# Altium PCB ESP32-C6-DisplayBoard.PcbDoc
Units mm, origin at the board's own origin, x right, y up, seen from the top; angles counter-clockwise.
Board outline 43 x 73 mm, 2 copper layers (Top Layer, Bottom Layer), stack 1.569 mm thick; 26 components, 31 nets, 175 pads, 72 vias.
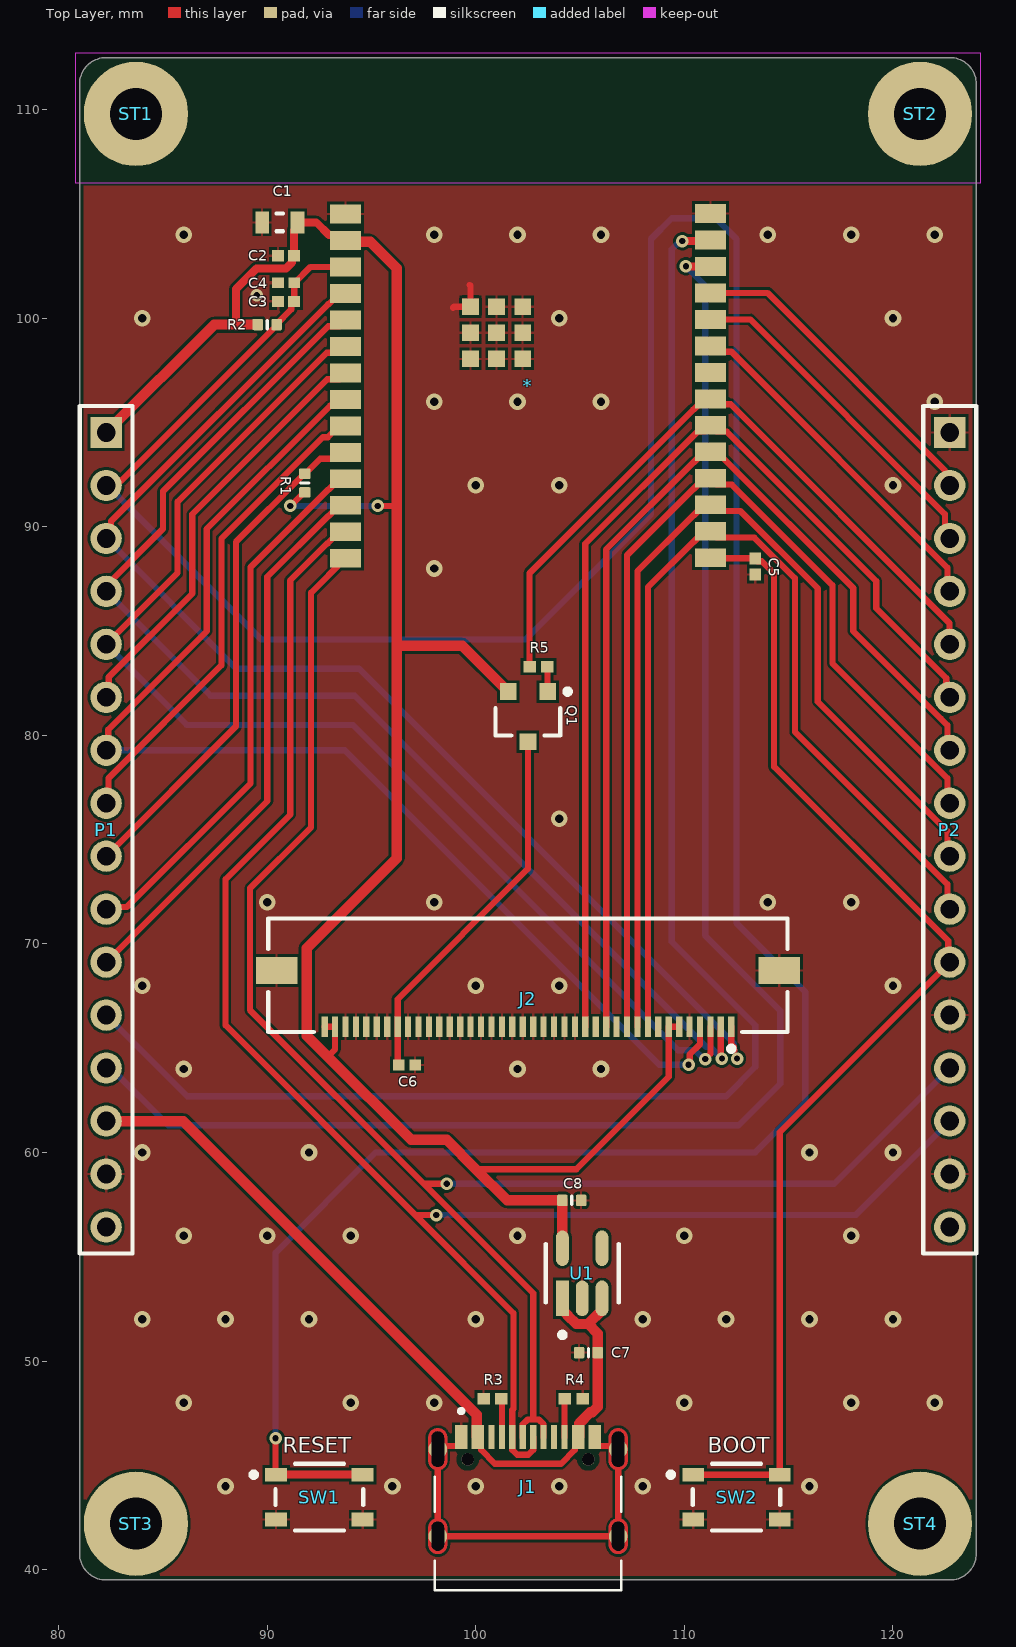
[diagram p0: Top Layer view]
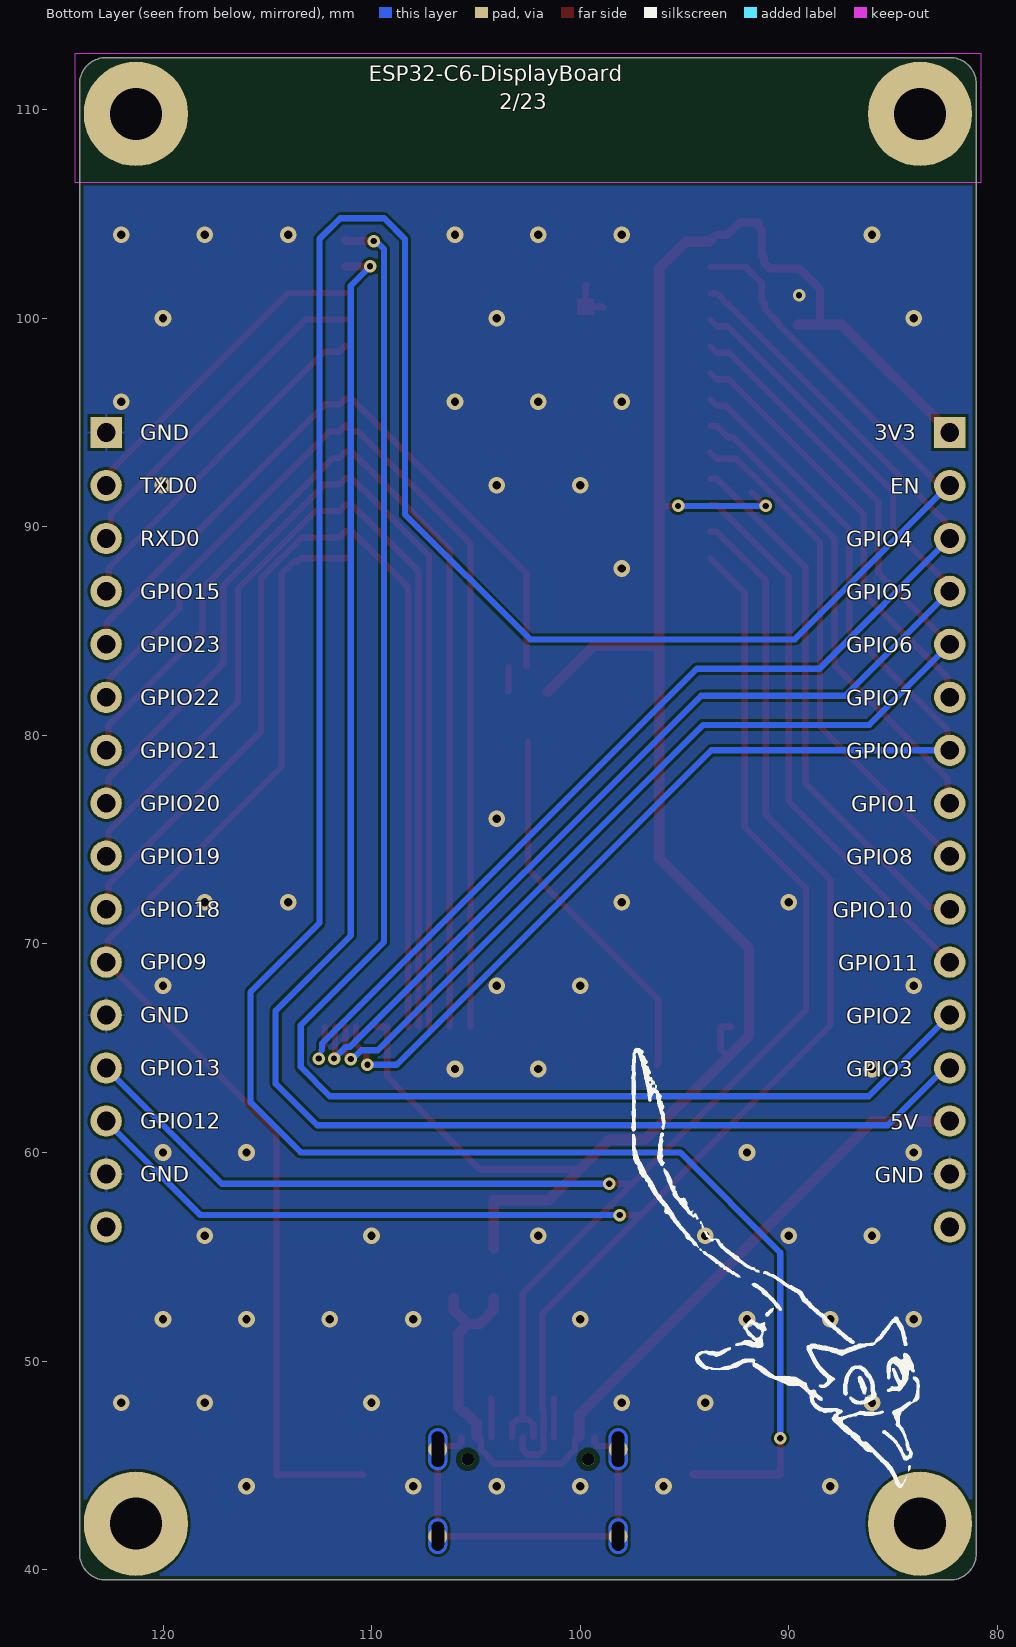
[diagram p1: Bottom Layer view, seen from below]
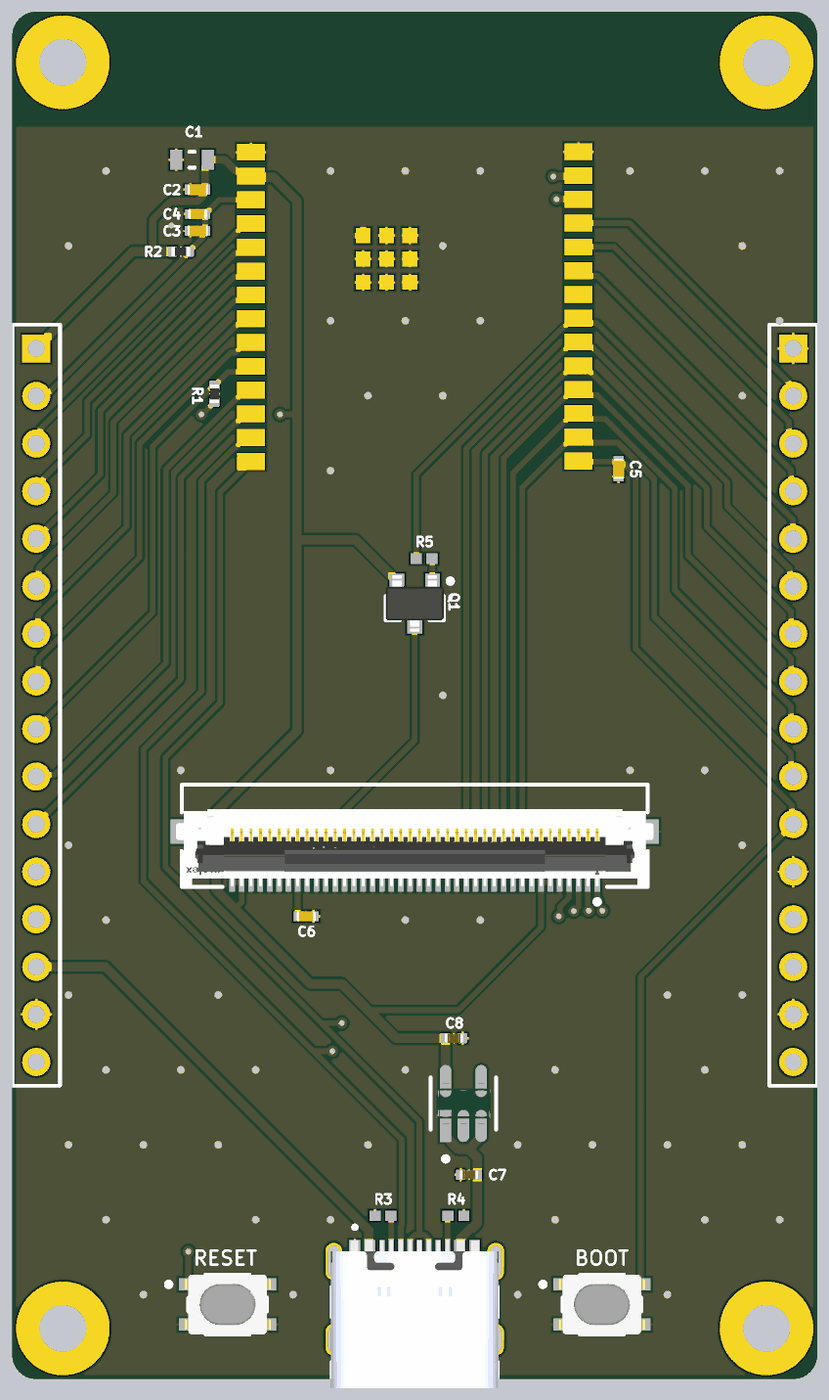
[diagram p2: 3D render of the assembled board from above, using the file's embedded part models]

## Layer stack, top to bottom
Top Solder: solder mask 0.0254, SM-001, Dk 4
Top Layer: signal copper 0.035
Dielectric 1: core 1.4986, Core-043, Dk 4.3
Bottom Layer: signal copper 0.035
Bottom Solder: solder mask 0.0254, SM-001, Dk 4

## Board outline
81,40.77 81,111.23 cw(c82.27,111.23) 82.27,112.5 122.73,112.5 cw(c122.73,111.23) 124,111.23 124,40.77 cw(c122.73,40.77) 122.73,39.5 82.27,39.5 cw(c82.27,40.77)

## Design rules (kind name [scope] priority, off if disabled: settings)
BoardOutlineClearance [All] p1: gap=0.2 ignorepadtopadclearanceinfootprint=FALSE
Clearance [All] p1: gap=0.127 ignorepadtopadclearanceinfootprint=FALSE except(0.25: Arc-Hole Track-Hole SMDPad-Hole THPad-Hole Via-Hole Fill-Hole Poly-Hole Region-Hole Text-Hole)
ComponentClearance [All] p1: gap=0.127 collisioncheckmode=3 verticalgap=0.127 showdistances=TRUE
DiffPairsRouting [All] p1: maxlimit=0.254 minlimit=0.127 mostfreqgap=0.127 toplayer_minwidth=0.127 toplayer_maxwidth=25.4 toplayer_prefwidth=0.127 bottomlayer_minwidth=0.127 bottomlayer_maxwidth=25.4 bottomlayer_prefwidth=0.127 maxuncoupledlength=12.7
Height [All] p1: minheight=0 maxheight=1816.048 prefheight=12.7
HoleSize [All] p1: absolutevalues=TRUE maxlimit=6.3 minlimit=0.3 maxpercent=80.000 minpercent=20.000
HoleToHoleClearance [All] p1: gap=0.25 allowstackedmicrovias=FALSE
MinimumAnnularRing [All] p1: minimumring=0.076
MinimumSolderMaskSliver [All] p1: minsoldermaskwidth=0
PlaneClearance [All] p1: clearance=0.127
PlaneConnect PlaneConnectPowerPads [InPadClass('PowerPads')] p1: planeconnectstyle=Direct reliefexpansion=0.508 reliefentries=4 reliefconductorwidth=0.254 reliefairgap=0.254
PlaneConnect [All] p2: pad.planeconnectstyle=Relief pad.reliefexpansion=0.3 pad.reliefentries=4 pad.reliefconductorwidth=0.127 pad.reliefairgap=0.127 via.planeconnectstyle=Direct via.reliefexpansion=0.3 via.reliefentries=4 via.reliefconductorwidth=0.127 via.reliefairgap=0.127
PolygonConnect PolygonConnectPowerPads [All vs (InPadClass('PowerPads'))] p1: connectstyle=Direct reliefconductorwidth=0.254 reliefentries=4 polygonreliefangle="90 Angle" airgapwidth=0.254
PolygonConnect [All] p2: thpad.connectstyle=Relief thpad.reliefconductorwidth=0.127 thpad.reliefentries=4 thpad.polygonreliefangle="90 Angle" thpad.airgapwidth=0.127 smdpad.connectstyle=Relief smdpad.reliefconductorwidth=0.127 smdpad.reliefentries=4 smdpad.polygonreliefangle="90 Angle" smdpad.airgapwidth=0.127 via.connectstyle=Direct via.reliefconductorwidth=0.127 via.reliefentries=4 via.polygonreliefangle="90 Angle" via.airgapwidth=0.127
RoutingVias [All] p1: holewidth=0.3 width=0.6 viastyle="Through Hole" minholewidth=0.3 minwidth=0.6 maxholewidth=0.6 maxwidth=6.6
SilkToSilkClearance [All] p1: silktosilkclearance=0
SilkToSolderMaskClearance [IsPad] p1: minsilkscreentomaskgap=0.127 clearancetoexposedcopper=TRUE
SolderMaskExpansion [All] p1: expansion=0.075 istentingtop=FALSE
Width [All] p1: maxlimit=25.4 minlimit=0.127 preferedwidth=0.127 minimp=50.000000 maximp=50.000000 favimp=50.000000
20 further rules are at their usual default settings.

## Classes and differential pairs
component class ESP32-C6-DisplayBoard: * C1 C2 C3 C4 C5 C7 C8 J1 R1 R2 R3 R4 ST1 ST2 ST3 ST4 SW1 SW2 U1
component class Components: C6 J2 P1 P2 Q1 R5

## Components (designator, comment, footprint, x,y, rotation, side; value= is the part's Value field where it differs from the comment)
* "ESP32-C6-WROOM-1" PCBComponent_1 105.775,86.907 r0 top
C1 "C1608X5R1A226M080AC" CAPC1608X100X20ML10 90.6,104.6 r0 top
C2 "Capacitor 0.1 uF +/- 5% 16 V 0402" CAPC1005X56X25LL10T15 90.9,103 r0 top value=100nF
C3 "Capacitor 0.1 uF +/- 5% 16 V 0402" CAPC1005X56X25LL10T15 90.9,100.8 r180 top value=100nF
C4 "Capacitor 1 uF +/- 10% 6.3 V 0402" CAPC1005X55X25LL05T10 90.9,101.7 r180 top value=1µF
C5 "Capacitor 0.1 uF +/- 5% 16 V 0402" CAPC1005X56X25LL10T15 113.4,88.1 r270 top value=100nF
C6 "Capacitor 1 uF +/- 10% 6.3 V 0402" CAPC1005X55X25LL05T10 96.7,64.2 r0 top value=1µF
C7 "Capacitor 2,2µF +/-20% 10V 0402" CAPC0402(1005)60_L 105.4,50.4 r180 top value=2.2µF
C8 "Capacitor 2,2µF +/-20% 10V 0402" CAPC0402(1005)60_L 104.6,57.7 r0 top value=2.2µF
J1 "TYPE-C-31-M-12" HRO_TYPE-C-31-M-12 102.5,41.6 r0 top
J2 "505110-4091" FP-505110-4091-MFG 102.5,68.5 r180 top
P1 "Header 16" HDR1X16 82.275,94.525 r270 top
P2 "Header 16" HDR1X16 122.725,94.525 r270 top
Q1 "AO3401A" AO-SOT-23-3L_V 102.5,80.9 r270 top
R1 "10KR2F" RESC0402(1005)_L 91.8,92.1 r270 top value=10k
R2 "10KR2F" RESC0402(1005)_L 90,99.7 r180 top value=10k
R3 "RC0402FR-075K1L" RESC1005X40X25NL05T10 100.8,48.2 r0 top
R4 "RC0402FR-075K1L" RESC1005X40X25NL05T10 104.7,48.2 r180 top
R5 "RC0402FR-075K1L" RESC1005X40X25NL05T10 103,83.3 r180 top
ST1 "PTH-M2D5X5" PTH-M2D5X5 83.7,109.8 r0 top
ST2 "PTH-M2D5X5" PTH-M2D5X5 121.3,109.8 r0 top
ST3 "PTH-M2D5X5" PTH-M2D5X5 83.7,42.2 r0 top
ST4 "PTH-M2D5X5" PTH-M2D5X5 121.3,42.2 r0 top
SW1 "PTS810SJM250SMTRLFS" FP-PTS810SJM250SMTRLFS-MFG 92.5,43.475 r0 top
SW2 "PTS810SJM250SMTRLFS" FP-PTS810SJM250SMTRLFS-MFG 112.5,43.475 r0 top
U1 "AP2112K-3.3TRG1" FP-SOT25-IPC_A 105.1,54.206 r90 top

## Footprints (in the part's own frame and the unit in brackets; to place one, negate y for a bottom-side part, rotate by r counter-clockwise, add the part's x,y. Pads: shape width x height; smd on the part's side, far side on the other; paste and mask are expansions set on the pad)
AO-SOT-23-3L_V [mm] "SOT23, 3-Leads, Body 3.1x1.8mm, Pitch 0.95mm"
  rect 0.8x0.8 smd: 1(-1.2,0.95) 2(-1.2,-0.95) 3(1.2,0)
  silkscreen extent -1.32,-1.55 0.9,2.03, body extent -1.5,-1.55 1.5,1.55, height 1.25
CAPC0402(1005)60_L [mm] "Chip Capacitor, Body 1.0x0.5mm, Height 0.6mm, IPC High Density"
  rrect25% 0.5x0.55 smd: 1(-0.45,0) 2(0.45,0)
  silkscreen extent 0,-0.2 0,0.2, body extent -0.5,-0.25 0.5,0.25, height 0.6
CAPC1005X55X25LL05T10 [mm] "Chip Capacitor, 2-Leads, Body 1.05x0.55mm, IPC High Density"
  rect 0.56x0.52 smd: 1(-0.39,0) 2(0.39,0)
  body extent -0.53,-0.28 0.53,0.28, height 0.55
CAPC1005X56X25LL10T15 [mm] "Chip Capacitor, 2-Leads, Body 1.10x0.60mm, IPC High Density"
  rect 0.58x0.54 smd: 1(-0.39,0) 2(0.39,0)
  body extent -0.55,-0.3 0.55,0.3, height 0.56
CAPC1608X100X20ML10 [mm] "Chip Capacitor, 2-Leads, Body 1.70x0.90mm, IPC Low Density"
  rect 0.65x1.05 smd: 1(-0.85,0) 2(0.85,0)
  silkscreen extent -0.15,-0.43 0.15,0.43, body extent -0.85,-0.45 0.85,0.45, height 1
FP-505110-4091-MFG [mm]
  rect 0.3x1 smd paste+0 mask+0: 1(-9.75,2.475) 2(-9.25,2.475) 3(-8.75,2.475) 4(-8.25,2.475) 5(-7.75,2.475) 6(-7.25,2.475) 7(-6.75,2.475) 8(-6.25,2.475) 9(-5.75,2.475) 10(-5.25,2.475) 11(-4.75,2.475) 12(-4.25,2.475) 13(-3.75,2.475) 14(-3.25,2.475) 15(-2.75,2.475) 16(-2.25,2.475) 17(-1.75,2.475) 18(-1.25,2.475) 19(-0.75,2.475) 20(-0.25,2.475) 21(0.25,2.475) 22(0.75,2.475) 23(1.25,2.475) 24(1.75,2.475) 25(2.25,2.475) 26(2.75,2.475) 27(3.25,2.475) 28(3.75,2.475) 29(4.25,2.475) 30(4.75,2.475) 31(5.25,2.475) 32(5.75,2.475) 33(6.25,2.475) 34(6.75,2.475) 35(7.25,2.475) 36(7.75,2.475) 37(8.25,2.475) 38(8.75,2.475) 39(9.25,2.475) 40(9.75,2.475)
  rect 2x1.3 smd paste+0 mask+0: 41(-12.05,-0.225) 42(12.05,-0.225)
  silkscreen extent -12.45,-2.73 12.45,3.65, body extent -13.15,-2.83 13.15,3.08, height 0.25
FP-PTS810SJM250SMTRLFS-MFG [mm]
  rect 1.05x0.65 smd paste+0 mask+0: 1(-2.075,1.075) 2(2.075,1.075) 3(-2.075,-1.075) 4(2.075,-1.075)
  silkscreen extent -3.27,-1.6 2.1,1.6, body extent -2.7,-1.7 2.7,1.7, height 0.25
FP-SOT25-IPC_A [mm]
  rect 1.707x0.616 smd paste+0 mask+0: 1(-1.201,0.95)
  rrect100% 1.707x0.616 smd paste+0 mask+0: 2(-1.201,0) 3(-1.201,-0.95) 4(1.201,-0.95) 5(1.201,0.95)
  silkscreen extent -3.08,-1.75 1.4,1.75, body extent -2.55,-2 2.55,2, height 0.25
HDR1X16 [mm] "Connector; Header; 16 Position"
  rect 1.5x1.5 hole 0.9: 1(0,0)
  round 1.5 hole 0.9: 2(2.54,0) 3(5.08,0) 4(7.62,0) 5(10.16,0) 6(12.7,0) 7(15.24,0) 8(17.78,0) 9(20.32,0) 10(22.86,0) 11(25.4,0) 12(27.94,0) 13(30.48,0) 14(33.02,0) 15(35.56,0) 16(38.1,0)
  silkscreen extent -1.27,-1.27 39.37,1.27
HRO_TYPE-C-31-M-12 [mm]
  rect 0.6x1.14 smd mask+0.05: A1/B12(-3.2,4.75) A4/B9(-2.4,4.75) B1/A12(3.2,4.75) B4/A9(2.4,4.75)
  rect 0.3x1.14 smd mask+0.05: A5(-1.25,4.75) A6(-0.25,4.75) A7(0.25,4.75) A8(1.25,4.75) B5(1.75,4.75) B6(0.75,4.75) B7(-0.75,4.75) B8(-1.75,4.75)
  round 0.9 hole 0.6 slot 1.7 at 90 deg mask+0: S1(-4.325,4.17) S2(4.325,4.17)
  round 0.9 hole 0.6 slot 1.4 at 90 deg mask+0: S3(-4.325,0) S4(4.325,0)
  round 0.6 hole 0.6 unplated: ""(-2.89,3.68) ""(2.89,3.68)
  Top Layer region: 4.349,0.849 4.372,0.848 4.395,0.844 4.419,0.84 4.441,0.835 4.464,0.828 4.486,0.82 4.508,0.811 4.529,0.801 4.55,0.79 4.57,0.777 4.59,0.764 4.608,0.75 4.626,0.734 4.643,0.718 4.659,0.701 4.675,0.683 4.689,0.665 4.702,0.645 4.715,0.625 4.726,0.604 4.736,0.583 4.745,0.561 4.753,0.539 4.76,0.516 4.765,0.494 4.769,0.47 4.773,0.447 4.774,0.424 4.775,0.4 4.775,-0.4 4.774,-0.424 4.773,-0.447 4.769,-0.47 4.765,-0.494 4.76,-0.516 4.753,-0.539 4.745,-0.561 4.736,-0.583 4.726,-0.604 4.715,-0.625 4.702,-0.645 4.689,-0.665 4.675,-0.683 4.659,-0.701 4.643,-0.718 4.626,-0.734 4.608,-0.75 4.59,-0.764 4.57,-0.777 4.55,-0.79 4.529,-0.801 4.508,-0.811 4.486,-0.82 4.464,-0.828 4.441,-0.835 4.419,-0.84 4.395,-0.844 4.372,-0.848 4.349,-0.849 4.325,-0.85 4.301,-0.849 4.278,-0.848 4.255,-0.844 4.231,-0.84 4.209,-0.835 4.186,-0.828 4.164,-0.82 4.142,-0.811 4.121,-0.801 4.1,-0.79 4.08,-0.777 4.06,-0.764 4.042,-0.75 4.024,-0.734 4.007,-0.718 3.991,-0.701 3.975,-0.683 3.961,-0.665 3.948,-0.645 3.935,-0.625 3.924,-0.604 3.914,-0.583 3.905,-0.561 3.897,-0.539 3.89,-0.516 3.885,-0.494 3.881,-0.47 3.877,-0.447 3.876,-0.424 3.875,-0.4 3.875,0.4 3.876,0.424 3.877,0.447 3.881,0.47 3.885,0.494 3.89,0.516 3.897,0.539 3.905,0.561 3.914,0.583 3.924,0.604 3.935,0.625 3.948,0.645 3.961,0.665 3.975,0.683 3.991,0.701 4.007,0.718 4.024,0.734 4.042,0.75 4.06,0.764 4.08,0.777 4.1,0.79 4.121,0.801 4.142,0.811 4.164,0.82 4.186,0.828 4.209,0.835 4.231,0.84 4.255,0.844 4.278,0.848 4.301,0.849 4.325,0.85
  Top Layer region: -4.301,0.849 -4.278,0.848 -4.255,0.844 -4.231,0.84 -4.209,0.835 -4.186,0.828 -4.164,0.82 -4.142,0.811 -4.121,0.801 -4.1,0.79 -4.08,0.777 -4.06,0.764 -4.042,0.75 -4.024,0.734 -4.007,0.718 -3.991,0.701 -3.975,0.683 -3.961,0.665 -3.948,0.645 -3.935,0.625 -3.924,0.604 -3.914,0.583 -3.905,0.561 -3.897,0.539 -3.89,0.516 -3.885,0.494 -3.881,0.47 -3.877,0.447 -3.876,0.424 -3.875,0.4 -3.875,-0.4 -3.876,-0.424 -3.877,-0.447 -3.881,-0.47 -3.885,-0.494 -3.89,-0.516 -3.897,-0.539 -3.905,-0.561 -3.914,-0.583 -3.924,-0.604 -3.935,-0.625 -3.948,-0.645 -3.961,-0.665 -3.975,-0.683 -3.991,-0.701 -4.007,-0.718 -4.024,-0.734 -4.042,-0.75 -4.06,-0.764 -4.08,-0.777 -4.1,-0.79 -4.121,-0.801 -4.142,-0.811 -4.164,-0.82 -4.186,-0.828 -4.209,-0.835 -4.231,-0.84 -4.255,-0.844 -4.278,-0.848 -4.301,-0.849 -4.325,-0.85 -4.349,-0.849 -4.372,-0.848 -4.395,-0.844 -4.419,-0.84 -4.441,-0.835 -4.464,-0.828 -4.486,-0.82 -4.508,-0.811 -4.529,-0.801 -4.55,-0.79 -4.57,-0.777 -4.59,-0.764 -4.608,-0.75 -4.626,-0.734 -4.643,-0.718 -4.659,-0.701 -4.675,-0.683 -4.689,-0.665 -4.702,-0.645 -4.715,-0.625 -4.726,-0.604 -4.736,-0.583 -4.745,-0.561 -4.753,-0.539 -4.76,-0.516 -4.765,-0.494 -4.769,-0.47 -4.773,-0.447 -4.774,-0.424 -4.775,-0.4 -4.775,0.4 -4.774,0.424 -4.773,0.447 -4.769,0.47 -4.765,0.494 -4.76,0.516 -4.753,0.539 -4.745,0.561 -4.736,0.583 -4.726,0.604 -4.715,0.625 -4.702,0.645 -4.689,0.665 -4.675,0.683 -4.659,0.701 -4.643,0.718 -4.626,0.734 -4.608,0.75 -4.59,0.764 -4.57,0.777 -4.55,0.79 -4.529,0.801 -4.508,0.811 -4.486,0.82 -4.464,0.828 -4.441,0.835 -4.419,0.84 -4.395,0.844 -4.372,0.848 -4.349,0.849 -4.325,0.85
  Top Layer region: 4.349,5.169 4.372,5.168 4.395,5.164 4.419,5.16 4.441,5.155 4.464,5.148 4.486,5.14 4.508,5.131 4.529,5.121 4.55,5.11 4.57,5.097 4.59,5.084 4.608,5.07 4.626,5.054 4.643,5.038 4.659,5.021 4.675,5.003 4.689,4.985 4.702,4.965 4.715,4.945 4.726,4.924 4.736,4.903 4.745,4.881 4.753,4.859 4.76,4.836 4.765,4.814 4.769,4.79 4.773,4.767 4.774,4.744 4.775,4.72 4.775,3.62 4.774,3.596 4.773,3.573 4.769,3.55 4.765,3.526 4.76,3.504 4.753,3.481 4.745,3.459 4.736,3.437 4.726,3.416 4.715,3.395 4.702,3.375 4.689,3.355 4.675,3.337 4.659,3.319 4.643,3.302 4.626,3.286 4.608,3.27 4.59,3.256 4.57,3.243 4.55,3.23 4.529,3.219 4.508,3.209 4.486,3.2 4.464,3.192 4.441,3.185 4.419,3.18 4.395,3.176 4.372,3.172 4.349,3.171 4.325,3.17 4.301,3.171 4.278,3.172 4.255,3.176 4.231,3.18 4.209,3.185 4.186,3.192 4.164,3.2 4.142,3.209 4.121,3.219 4.1,3.23 4.08,3.243 4.06,3.256 4.042,3.27 4.024,3.286 4.007,3.302 3.991,3.319 3.975,3.337 3.961,3.355 3.948,3.375 3.935,3.395 3.924,3.416 3.914,3.437 3.905,3.459 3.897,3.481 3.89,3.504 3.885,3.526 3.881,3.55 3.877,3.573 3.876,3.596 3.875,3.62 3.875,4.72 3.876,4.744 3.877,4.767 3.881,4.79 3.885,4.814 3.89,4.836 3.897,4.859 3.905,4.881 3.914,4.903 3.924,4.924 3.935,4.945 3.948,4.965 3.961,4.985 3.975,5.003 3.991,5.021 4.007,5.038 4.024,5.054 4.042,5.07 4.06,5.084 4.08,5.097 4.1,5.11 4.121,5.121 4.142,5.131 4.164,5.14 4.186,5.148 4.209,5.155 4.231,5.16 4.255,5.164 4.278,5.168 4.301,5.169 4.325,5.17
  Top Layer region: -4.301,5.169 -4.278,5.168 -4.255,5.164 -4.231,5.16 -4.209,5.155 -4.186,5.148 -4.164,5.14 -4.142,5.131 -4.121,5.121 -4.1,5.11 -4.08,5.097 -4.06,5.084 -4.042,5.07 -4.024,5.054 -4.007,5.038 -3.991,5.021 -3.975,5.003 -3.961,4.985 -3.948,4.965 -3.935,4.945 -3.924,4.924 -3.914,4.903 -3.905,4.881 -3.897,4.859 -3.89,4.836 -3.885,4.814 -3.881,4.79 -3.877,4.767 -3.876,4.744 -3.875,4.72 -3.875,3.62 -3.876,3.596 -3.877,3.573 -3.881,3.55 -3.885,3.526 -3.89,3.504 -3.897,3.481 -3.905,3.459 -3.914,3.437 -3.924,3.416 -3.935,3.395 -3.948,3.375 -3.961,3.355 -3.975,3.337 -3.991,3.319 -4.007,3.302 -4.024,3.286 -4.042,3.27 -4.06,3.256 -4.08,3.243 -4.1,3.23 -4.121,3.219 -4.142,3.209 -4.164,3.2 -4.186,3.192 -4.209,3.185 -4.231,3.18 -4.255,3.176 -4.278,3.172 -4.301,3.171 -4.325,3.17 -4.349,3.171 -4.372,3.172 -4.395,3.176 -4.419,3.18 -4.441,3.185 -4.464,3.192 -4.486,3.2 -4.508,3.209 -4.529,3.219 -4.55,3.23 -4.57,3.243 -4.59,3.256 -4.608,3.27 -4.626,3.286 -4.643,3.302 -4.659,3.319 -4.675,3.337 -4.689,3.355 -4.702,3.375 -4.715,3.395 -4.726,3.416 -4.736,3.437 -4.745,3.459 -4.753,3.481 -4.76,3.504 -4.765,3.526 -4.769,3.55 -4.773,3.573 -4.774,3.596 -4.775,3.62 -4.775,4.72 -4.774,4.744 -4.773,4.767 -4.769,4.79 -4.765,4.814 -4.76,4.836 -4.753,4.859 -4.745,4.881 -4.736,4.903 -4.726,4.924 -4.715,4.945 -4.702,4.965 -4.689,4.985 -4.675,5.003 -4.659,5.021 -4.643,5.038 -4.626,5.054 -4.608,5.07 -4.59,5.084 -4.57,5.097 -4.55,5.11 -4.529,5.121 -4.508,5.131 -4.486,5.14 -4.464,5.148 -4.441,5.155 -4.419,5.16 -4.395,5.164 -4.372,5.168 -4.349,5.169 -4.325,5.17
  Bottom Layer region: 4.349,0.849 4.372,0.848 4.395,0.844 4.419,0.84 4.441,0.835 4.464,0.828 4.486,0.82 4.508,0.811 4.529,0.801 4.55,0.79 4.57,0.777 4.59,0.764 4.608,0.75 4.626,0.734 4.643,0.718 4.659,0.701 4.675,0.683 4.689,0.665 4.702,0.645 4.715,0.625 4.726,0.604 4.736,0.583 4.745,0.561 4.753,0.539 4.76,0.516 4.765,0.494 4.769,0.47 4.773,0.447 4.774,0.424 4.775,0.4 4.775,-0.4 4.774,-0.424 4.773,-0.447 4.769,-0.47 4.765,-0.494 4.76,-0.516 4.753,-0.539 4.745,-0.561 4.736,-0.583 4.726,-0.604 4.715,-0.625 4.702,-0.645 4.689,-0.665 4.675,-0.683 4.659,-0.701 4.643,-0.718 4.626,-0.734 4.608,-0.75 4.59,-0.764 4.57,-0.777 4.55,-0.79 4.529,-0.801 4.508,-0.811 4.486,-0.82 4.464,-0.828 4.441,-0.835 4.419,-0.84 4.395,-0.844 4.372,-0.848 4.349,-0.849 4.325,-0.85 4.301,-0.849 4.278,-0.848 4.255,-0.844 4.231,-0.84 4.209,-0.835 4.186,-0.828 4.164,-0.82 4.142,-0.811 4.121,-0.801 4.1,-0.79 4.08,-0.777 4.06,-0.764 4.042,-0.75 4.024,-0.734 4.007,-0.718 3.991,-0.701 3.975,-0.683 3.961,-0.665 3.948,-0.645 3.935,-0.625 3.924,-0.604 3.914,-0.583 3.905,-0.561 3.897,-0.539 3.89,-0.516 3.885,-0.494 3.881,-0.47 3.877,-0.447 3.876,-0.424 3.875,-0.4 3.875,0.4 3.876,0.424 3.877,0.447 3.881,0.47 3.885,0.494 3.89,0.516 3.897,0.539 3.905,0.561 3.914,0.583 3.924,0.604 3.935,0.625 3.948,0.645 3.961,0.665 3.975,0.683 3.991,0.701 4.007,0.718 4.024,0.734 4.042,0.75 4.06,0.764 4.08,0.777 4.1,0.79 4.121,0.801 4.142,0.811 4.164,0.82 4.186,0.828 4.209,0.835 4.231,0.84 4.255,0.844 4.278,0.848 4.301,0.849 4.325,0.85
  Bottom Layer region: -4.301,0.849 -4.278,0.848 -4.255,0.844 -4.231,0.84 -4.209,0.835 -4.186,0.828 -4.164,0.82 -4.142,0.811 -4.121,0.801 -4.1,0.79 -4.08,0.777 -4.06,0.764 -4.042,0.75 -4.024,0.734 -4.007,0.718 -3.991,0.701 -3.975,0.683 -3.961,0.665 -3.948,0.645 -3.935,0.625 -3.924,0.604 -3.914,0.583 -3.905,0.561 -3.897,0.539 -3.89,0.516 -3.885,0.494 -3.881,0.47 -3.877,0.447 -3.876,0.424 -3.875,0.4 -3.875,-0.4 -3.876,-0.424 -3.877,-0.447 -3.881,-0.47 -3.885,-0.494 -3.89,-0.516 -3.897,-0.539 -3.905,-0.561 -3.914,-0.583 -3.924,-0.604 -3.935,-0.625 -3.948,-0.645 -3.961,-0.665 -3.975,-0.683 -3.991,-0.701 -4.007,-0.718 -4.024,-0.734 -4.042,-0.75 -4.06,-0.764 -4.08,-0.777 -4.1,-0.79 -4.121,-0.801 -4.142,-0.811 -4.164,-0.82 -4.186,-0.828 -4.209,-0.835 -4.231,-0.84 -4.255,-0.844 -4.278,-0.848 -4.301,-0.849 -4.325,-0.85 -4.349,-0.849 -4.372,-0.848 -4.395,-0.844 -4.419,-0.84 -4.441,-0.835 -4.464,-0.828 -4.486,-0.82 -4.508,-0.811 -4.529,-0.801 -4.55,-0.79 -4.57,-0.777 -4.59,-0.764 -4.608,-0.75 -4.626,-0.734 -4.643,-0.718 -4.659,-0.701 -4.675,-0.683 -4.689,-0.665 -4.702,-0.645 -4.715,-0.625 -4.726,-0.604 -4.736,-0.583 -4.745,-0.561 -4.753,-0.539 -4.76,-0.516 -4.765,-0.494 -4.769,-0.47 -4.773,-0.447 -4.774,-0.424 -4.775,-0.4 -4.775,0.4 -4.774,0.424 -4.773,0.447 -4.769,0.47 -4.765,0.494 -4.76,0.516 -4.753,0.539 -4.745,0.561 -4.736,0.583 -4.726,0.604 -4.715,0.625 -4.702,0.645 -4.689,0.665 -4.675,0.683 -4.659,0.701 -4.643,0.718 -4.626,0.734 -4.608,0.75 -4.59,0.764 -4.57,0.777 -4.55,0.79 -4.529,0.801 -4.508,0.811 -4.486,0.82 -4.464,0.828 -4.441,0.835 -4.419,0.84 -4.395,0.844 -4.372,0.848 -4.349,0.849 -4.325,0.85
  Bottom Layer region: 4.349,5.169 4.372,5.168 4.395,5.164 4.419,5.16 4.441,5.155 4.464,5.148 4.486,5.14 4.508,5.131 4.529,5.121 4.55,5.11 4.57,5.097 4.59,5.084 4.608,5.07 4.626,5.054 4.643,5.038 4.659,5.021 4.675,5.003 4.689,4.985 4.702,4.965 4.715,4.945 4.726,4.924 4.736,4.903 4.745,4.881 4.753,4.859 4.76,4.836 4.765,4.814 4.769,4.79 4.773,4.767 4.774,4.744 4.775,4.72 4.775,3.62 4.774,3.596 4.773,3.573 4.769,3.55 4.765,3.526 4.76,3.504 4.753,3.481 4.745,3.459 4.736,3.437 4.726,3.416 4.715,3.395 4.702,3.375 4.689,3.355 4.675,3.337 4.659,3.319 4.643,3.302 4.626,3.286 4.608,3.27 4.59,3.256 4.57,3.243 4.55,3.23 4.529,3.219 4.508,3.209 4.486,3.2 4.464,3.192 4.441,3.185 4.419,3.18 4.395,3.176 4.372,3.172 4.349,3.171 4.325,3.17 4.301,3.171 4.278,3.172 4.255,3.176 4.231,3.18 4.209,3.185 4.186,3.192 4.164,3.2 4.142,3.209 4.121,3.219 4.1,3.23 4.08,3.243 4.06,3.256 4.042,3.27 4.024,3.286 4.007,3.302 3.991,3.319 3.975,3.337 3.961,3.355 3.948,3.375 3.935,3.395 3.924,3.416 3.914,3.437 3.905,3.459 3.897,3.481 3.89,3.504 3.885,3.526 3.881,3.55 3.877,3.573 3.876,3.596 3.875,3.62 3.875,4.72 3.876,4.744 3.877,4.767 3.881,4.79 3.885,4.814 3.89,4.836 3.897,4.859 3.905,4.881 3.914,4.903 3.924,4.924 3.935,4.945 3.948,4.965 3.961,4.985 3.975,5.003 3.991,5.021 4.007,5.038 4.024,5.054 4.042,5.07 4.06,5.084 4.08,5.097 4.1,5.11 4.121,5.121 4.142,5.131 4.164,5.14 4.186,5.148 4.209,5.155 4.231,5.16 4.255,5.164 4.278,5.168 4.301,5.169 4.325,5.17
  Bottom Layer region: -4.301,5.169 -4.278,5.168 -4.255,5.164 -4.231,5.16 -4.209,5.155 -4.186,5.148 -4.164,5.14 -4.142,5.131 -4.121,5.121 -4.1,5.11 -4.08,5.097 -4.06,5.084 -4.042,5.07 -4.024,5.054 -4.007,5.038 -3.991,5.021 -3.975,5.003 -3.961,4.985 -3.948,4.965 -3.935,4.945 -3.924,4.924 -3.914,4.903 -3.905,4.881 -3.897,4.859 -3.89,4.836 -3.885,4.814 -3.881,4.79 -3.877,4.767 -3.876,4.744 -3.875,4.72 -3.875,3.62 -3.876,3.596 -3.877,3.573 -3.881,3.55 -3.885,3.526 -3.89,3.504 -3.897,3.481 -3.905,3.459 -3.914,3.437 -3.924,3.416 -3.935,3.395 -3.948,3.375 -3.961,3.355 -3.975,3.337 -3.991,3.319 -4.007,3.302 -4.024,3.286 -4.042,3.27 -4.06,3.256 -4.08,3.243 -4.1,3.23 -4.121,3.219 -4.142,3.209 -4.164,3.2 -4.186,3.192 -4.209,3.185 -4.231,3.18 -4.255,3.176 -4.278,3.172 -4.301,3.171 -4.325,3.17 -4.349,3.171 -4.372,3.172 -4.395,3.176 -4.419,3.18 -4.441,3.185 -4.464,3.192 -4.486,3.2 -4.508,3.209 -4.529,3.219 -4.55,3.23 -4.57,3.243 -4.59,3.256 -4.608,3.27 -4.626,3.286 -4.643,3.302 -4.659,3.319 -4.675,3.337 -4.689,3.355 -4.702,3.375 -4.715,3.395 -4.726,3.416 -4.736,3.437 -4.745,3.459 -4.753,3.481 -4.76,3.504 -4.765,3.526 -4.769,3.55 -4.773,3.573 -4.774,3.596 -4.775,3.62 -4.775,4.72 -4.774,4.744 -4.773,4.767 -4.769,4.79 -4.765,4.814 -4.76,4.836 -4.753,4.859 -4.745,4.881 -4.736,4.903 -4.726,4.924 -4.715,4.945 -4.702,4.965 -4.689,4.985 -4.675,5.003 -4.659,5.021 -4.643,5.038 -4.626,5.054 -4.608,5.07 -4.59,5.084 -4.57,5.097 -4.55,5.11 -4.529,5.121 -4.508,5.131 -4.486,5.14 -4.464,5.148 -4.441,5.155 -4.419,5.16 -4.395,5.164 -4.372,5.168 -4.349,5.169 -4.325,5.17
  silkscreen extent -4.47,-2.6 4.47,6.1, body extent -4.47,-2.6 4.47,5.31, height 3.31
PCBComponent_1 [mm]
  rect 1.5x0.9 smd paste-2539.97 mask+0.05: 1(-12.025,18.092) 2(-12.025,16.822) 3(-12.025,15.552) 4(-12.025,14.282) 5(-12.025,13.012) 6(-12.025,11.742) 7(-12.025,10.472) 8(-12.025,9.202) 9(-12.025,7.932) 10(-12.025,6.662) 11(-12.025,5.392) 12(-12.025,4.122) 13(-12.025,2.852) 14(-12.025,1.582) 15(5.475,1.607) 16(5.475,2.877) 17(5.475,4.147) 18(5.475,5.417) 19(5.475,6.687) 20(5.475,7.957) 21(5.475,9.227) 22(5.475,10.497) 23(5.475,11.767) 24(5.475,13.037) 25(5.475,14.307) 26(5.475,15.577) 27(5.475,16.847) 28(5.475,18.117)
  rect 0.8x0.8 smd paste-2539.97 mask+0.05: 29(-6.03,11.147) 29(-6.03,12.397) 29(-6.03,13.647) 29(-4.78,11.147) 29(-4.78,12.397) 29(-4.78,13.647) 29(-3.53,11.147) 29(-3.53,12.397) 29(-3.53,13.647)
  Top Layer region: -6.43,13.247 -5.63,13.247 -5.63,14.047 -6.43,14.047
PTH-M2D5X5 [mm]
  round 5 hole 2.5: 1(0,0)
RESC0402(1005)_L [mm] "Chip Resistor, Body 1.0x0.5mm, IPC High Density"
  rrect25% 0.5x0.55 smd: 1(-0.45,0) 2(0.45,0)
  silkscreen extent 0,-0.2 0,0.2, body extent -0.5,-0.25 0.5,0.25, height 0.3
RESC1005X40X25NL05T10 [mm] "Chip Resistor, 2-Leads, Body 1.00x0.50mm, IPC Medium Density"
  rect 0.6x0.55 smd: 1(-0.425,0) 2(0.425,0)
  body extent -0.53,-0.27 0.53,0.28, height 0.4

## Part data
*: library part CMP-001-0002-6, "ESP32-C6-WROOM-1 Module"
C1: library part CMP-2000-05441-1, "Chip Capacitor, 22 uF, +/- 20%, 10 V, -55 to 85 degC, 0603 (1608 Metric), RoHS, Tape and Reel", Capacitance=22µF, Manufacturer=TDK, Operating Temperature=-55degC~85degC, Package / Case=0603(1608Metric), Package Description="2-Pin Surface Mount Device, Body 1.6 x 0.8 mm", Package Reference=603, PCN Part Number=MLCCPartNumberChange30/Nov/2012, Ratings=-, Standard Package=1, Temperature Coefficient=X5R, Tolerance=±20%, Voltage - Rated=10V, Applications=GeneralPurpose, Category=Capacitors, Datasheet URL=http://download.siliconexpert.com/pdfs/2015/4/21/15/54/45/779/tdk_/manual/37024850441143360mlcc_commercial_general_en.pdf, Datasheet Version=Mar-15, Design Resources=20WNon-IsolatedBuckLEDDriverUsingPLLNK460KG, Family=CeramicCapacitors, Features=-, Height - Seated (Max)=-, Kits=445-9014-KIT-ND-KITMLCC100PF-22UF060310-50V, Lead Spacing=-, Lead Style=-, Manufacturer URL=http://www.tdk.com/, Mounting Type=SurfaceMount,MLCC, Online Catalog=CSeries,GeneralPurpose, Other Names=445-9077-1, Packaging=CutTape(CT), Product Training Modules=CSeriesGeneralApplicationsSEAT,CCV,andTVCLDesignToolsGuidetoReplacinganElectrolyticCapacitorwithanMLCC, RoHS Information=RoHSCertificate-MLCC, Series=C, Size / Dimension="0.063\"Lx0.031\"W(1.60mmx0.80mm)", Thickness (Max)="0.035\"(0.90mm)"
C2 C3 C5: library part CMP-001-00001-6, "Chip Capacitor, 0.1 uF, +/- 5%, 16 V, 0402 (1005 Metric)", Capacitor Type=Ceramic, Case/Package=0402, Max Operating Temperature=125°C, Min Operating Temperature=-55°C, Tolerance=5%, Voltage Rating=16V, Mounting Technology=SM, Pins=2, RoHS Compliant=True
C4 C6: library part CMP-001-00008-6, "Chip Capacitor, 1 uF, +/- 10%, 6.3 V, 0402 (1005 Metric)", Capacitor Type=Ceramic, Case/Package=0402, Max Operating Temperature=85°C, Min Operating Temperature=-55°C, Tolerance=10%, Voltage Rating=6.3V, Mounting Technology=SM, Pins=2, RoHS Compliant=True
C7 C8: library part CMP-001-00056-4, "Chip Capacitor, 2,2µF +/-20%, 10V, 0402, Thickness 0.6 mm", Case/Package=0402, Max Operating Temperature=85°C, Min Operating Temperature=-55°C, Tolerance=10%, Voltage Rating=10V, Mounting Technology=SMT, Pins=2
J1: library part CMP-005-000000-1, "USB Connectors 24 Receptacle 1 8.94*7.3mm RoHS", Package=Package, Availability="Not in stock", Check_prices=https://www.snapeda.com/parts/TYPE-C-31-M-12/HRO+Electronics+Co.%252C+Ltd./view-part/?ref=eda, Component Type=Standard, Design Item ID=TYPE-C-31-M-12, MF="HRO Electronics Co., Ltd.", MP=TYPE-C-31-M-12, Pin Count=16, Price=None, SnapEDA_Link=https://www.snapeda.com/parts/TYPE-C-31-M-12/HRO+Electronics+Co.%252C+Ltd./view-part/?ref=snap, Source=TYPE-C-31-M-12.SchLib
J2: library part CMP-04775-000011-1, "CONN FFC/FPC BOTTOM 40P .5MM R/A", Actuator Color=Black, Current Rating=500mA, Flammability Rating="UL94 V-0", Housing Color=Beige, Max Operating Temperature=105°C, Min Operating Temperature=-40°C, Voltage Rating=50V, Actuator Material=Nylon, Contact Material=Bronze, Contact Plating=Gold, Gender=Receptacle, Halogen Free="Low Halogen", Height=1.9mm, Housing Material=Polymer, Mating Cycles=25, Mount="Surface Mount", Number of Circuits=40, Number of Contacts=40, Number of Pins=40, Number of Positions=40, Number of Rows=1, Orientation="Right Angle", Packaging="Cut Tape", Pitch=0.5mm, Series="Easy-On 505110", Termination=Solder
P1 P2: "Header, 16-Pin", LatestRevisionDate=17-Jul-2002, LatestRevisionNote="Re-released for DXP Platform.", Publisher="Altium Limited"
Q1: library part CMP-2000-05778-1, "P-Channel MOSFET, 30 V, 4 A, -55 to 150 degC, 3-Pin SOT-23-3L, RoHS, Tape and Reel", Continuous Drain Current=4A, Drain-Source On-Volt=30V, Frequency (Max)=NotRequiredMHz, Gate-Source Voltage (Max)=?12V, Manufacturer="Alpha and Omega", Operating Temp Range=-55Cto150C, Operating Temperature Classification=Military, Output Power (Max)=NotRequiredW, Package Description="3-Pin Small Outline Transistor, Body 2.95 x 1.6 mm, Pitch 0.95 mm", Package Reference=SOT-23-3L, Package Type=SOT-23, Power Dissipation=1.4W, Power Gain=NotRequireddB, Channel Mode=Enhancement, Datasheet URL=http://www.aosmd.com/res/data_sheets/AO3401A.pdf, Datasheet Version="Rev. 3, 03/2011", Drain Current (Max)=4A, Drain Efficiency=NotRequired%, Drain-Source On-Res=0.044ohm, Manufacturer URL=http://www.aosmd.com/, Mounting=SurfaceMount, Mounting Technology=SurfaceMount, Noise Figure=NotRequireddB, Number of  Elements=1, Package URL=http://www.aosmd.com/res/packaging_information/SOT-23-3L.pdf, Pin Count=3, Polarity=P, Rad Hardened=No, Type=PowerMOSFET
R1 R2: library part CMP-009-00066-2, "10K 0.063W 1% 0402 (1005 Metric)  SMD", Case/Package=0402, Power=63mW, Tolerance=1%, Mounting Technology=SMT, Pins=2
R3 R4 R5: library part CMP-2002-07753-1, Manufacturer="Yageo / Phycomp", Part Number=RC0402FR-075K1L
ST1 ST2 ST3 ST4: library part CMP-00028-00004-2, "M2 PTH (2.5mm), 5mm pad", Pins=1
SW1 SW2: library part CMP-10040-000001-2, "SWITCH TACTILE SPST-NO 0.05A 16V", Case/Package=SMD/SMT, Color=Black, Current Rating=50mA, Max Operating Temperature=85°C, Min Operating Temperature=-40°C, Operating Force=160gf, Package Quantity=2900, Voltage Rating (DC)=16V, Actuator Type=Standard, Contact Plating=Silver, Depth=4.6mm, Illumination Type=Non-Illuminated, Lead Free="Lead Free", Length=3.2mm, Max Current Rating=50mA, Mechanical Life=150000Cycles, Mount="Surface Mount", Orientation=Straight, Packaging="Tape and Reel", RoHS Compliant=Yes, Switch Function=Off-Mom, Switch Travel=0.15mm, Termination=J-Bend, Throw Configuration=SPST
U1: library part CMP-12756-000035-1, "IC REG LINEAR 3.3V 600MA SOT25", Case/Package=SOT-23-5, Dropout Voltage=250mV, Max Input Voltage=6V, Max Operating Temperature=85°C, Max Output Current=600mA, Min Input Voltage=2.5V, Min Operating Temperature=-40°C, Output Voltage=3.3V, Package Quantity=1, Quiescent Current=55uA, Accuracy=1.5%, Height=1.3mm, Lead Free="Lead Free", Length=3.1mm, Mount="Surface Mount", Number of Outputs=1, Number of Pins=5, Number of Regulators=1, Output Current=600mA, Output Type=Fixed, Packaging="Tape and Reel", Polarity=Positive, Width=1.7mm

## Via types
v1: diameter 0.8, hole 0.4, Top Layer to Bottom Layer, tented both sides, 60 vias
v2: diameter 0.6, hole 0.3, Top Layer to Bottom Layer, tented both sides, 12 vias

## Nets (pads, with @x,y where several pads share a name; then routed paths per layer and width w, separated by ;. In a path a pad name is that pad's centre, name@x,y a point inside that pad or via, vN(x,y) a via of type N, cw(c..) or ccw(c..) an arc to the next point about the centre after c; other vN are vias at no path point)
3V3: *.2 C1.2 C2.2 C8.1 J2.6 J2.7 J2.39 J2.40 P1.1 Q1.2 R1.2 R2.2 U1.5 | length 106.8
  Top Layer w0.3: v2(91.1,91) 91.125,91 91.775,91.65 R1.2 ; J2.40 J2.39 93.25,64.95 92.9,64.6 ; v2(95.3,91) 96.2,91 ; 100.001,59.199 104.823,59.199 109.25,63.626 J2.7 J2.6
  Top Layer w0.381: 88.5,99.7 88.5,101.4 89.481,102.381 90.901,102.381 91.191,102.671 91.191,102.921 91.27,103 C2.2 91.29,104.24 91.45,104.4 C1.2 92.346,104.6 92.957,103.989 93.49,103.989 *.2
  Top Layer w0.5: P1.1 87.45,99.7 88.5,99.7 R2.2 ; *.2 93.82,103.66 94.94,103.66 96.2,102.4 96.2,91 96.2,84.3 ; Q1.2 99.35,84.3 96.2,84.3 ; U1.5 C8.1 101.5,57.7 100.001,59.199 98.6,60.6 96.9,60.6 92.9,64.6 91.9,65.6 91.9,69.8 96.2,74.1 96.2,84.3
  Bottom Layer w0.3: v2(91.1,91) v2(95.3,91)
+5: C7.1 J1.A4/B9 J1.B4/A9 P1.14 U1.1 U1.3 | length 40.7
  Top Layer w0.3: J1.A4/B9 100.25,46.2 100.25,45.738 100.912,45.076 104.088,45.076 104.75,45.738 104.75,46.2 J1.B4/A9
  Top Layer w0.5: P1.14 85.962,61.505 100.05,47.417 100.05,46.4 J1.A4/B9 ; U1.1 104.15,52.46 104.415,52.195 104.415,52.176 104.816,51.775 105.384,51.775 ; J1.B4/A9 104.95,46.4 104.95,47.003 105.495,47.548 105.581,47.548 105.85,47.817 C7.1 105.85,51.309 105.384,51.775 ; U1.3 106.05,52.442 105.384,51.775
GND: *.1 *.28 *.29 C1.1 C2.1 C3.2 C4.2 C5.2 C6.2 C7.2 C8.2 J1.A1/B12 J1.B1/A12 J1.S1 J1.S2 J1.S3 J1.S4 J2.5 J2.16 J2.17 J2.18 J2.19 J2.20 J2.21 J2.22 J2.23 J2.24 J2.25 J2.26 J2.27 J2.28 J2.29 J2.30 J2.31 J2.32 J2.34 J2.35 J2.36 J2.37 J2.38 J2.41 J2.42 P1.15 P2.1 P2.12 P2.15 R3.1 R4.1 SW1.3 SW1.4 SW2.3 SW2.4 U1.2 | length 22
  Top Layer w0.3: 98.9,100.5 98.955,100.555 99.745,100.555 99.745,101.555 99.7,101.6 ; J1.A1/B12 99.3,46.08 99.15,45.93 98.497,45.93 98.337,45.77 J1.S1 J1.S3 J1.S4 J1.S2 106.663,45.77 106.503,45.93 105.85,45.93 105.7,46.08 J1.B1/A12
  other v1: 88,44 96,44 100,44 104,44 108,44 116,44 86,48 94,48 98,48 110,48 118,48 122,48 84,52 88,52 92,52 100,52 108,52 112,52 116,52 120,52 86,56 90,56 94,56 102,56 110,56 118,56 84,60 92,60 116,60 120,60 86,64 102,64 106,64 84,68 100,68 104,68 120,68 90,72 98,72 114,72 118,72 104,76 98,88 100,92 104,92 120,92 98,96 102,96 106,96 122,96 84,100 104,100 120,100 86,104 98,104 102,104 106,104 114,104 118,104 122,104
  other v2: 89.5,101.1
Net*_3: *.3 C3.1 C4.1 P1.2 R2.1 SW1.1 SW1.2 | length 152.3
  Top Layer w0.3: P1.2 82.505,92.215 82.99,92.215 90.45,99.675 R2.1 90.45,99.725 91.15,100.425 91.15,100.68 91.27,100.8 C3.1 C4.1 91.31,101.7 92.07,102.46 *.3 ; v2(90.4,46.3) 90.4,44.575 SW1.1
  Top Layer w0.381: SW1.1 SW1.2
  Bottom Layer w0.3: P1.2 82.315,91.985 89.7,84.6 102.4,84.6 108.4,90.6 108.4,103.8 109.4,104.8 111.5,104.8 112.5,103.8 112.5,71 115.8,67.7 115.8,62.4 113.4,60 95.2,60 90.4,55.2 v2(90.4,46.3)
Net*_4: *.4 J2.1 P1.3 | length 58.3
  Top Layer w0.3: P1.3 82.505,89.675 82.505,90.266 92.916,100.678 92.938,100.678 93.45,101.19 *.4 ; J2.1 112.25,65.192 112.371,65.071 112.371,64.929 112.4,64.9
  Bottom Layer w0.3: P1.3 88.52,83.2 94.4,83.2 112.371,65.229 112.371,64.929 112.4,64.9
  other v2: 112.527,64.5
Net*_5: *.5 J2.2 P1.4 | length 58.4
  Top Layer w0.3: P1.4 82.275,87.175 85,89.9 85,91.7 92.92,99.62 93.45,99.62 *.5 ; J2.2 111.75,64.55 v2(111.8,64.5)
  Bottom Layer w0.3: P1.4 87.28,81.9 94.2,81.9 111.042,65.058 111.242,65.058 v2(111.8,64.5)
Net*_6: *.6 J2.3 P1.5 | length 58
  Top Layer w0.3: P1.5 85.7,87.79 85.7,91.2 92.85,98.35 93.45,98.35 *.6 ; v2(111,64.481) 111.25,64.731 J2.3
  Bottom Layer w0.3: P1.5 86.14,80.5 94.1,80.5 109.7,64.9 110.5,64.9 110.919,64.481 v2(111,64.481)
Net*_7: *.7 P1.6 | length 20.6
  Top Layer w0.3: P1.6 82.399,81.949 82.399,82.799 86.4,86.8 86.4,90.6 92.88,97.08 93.45,97.08 *.7
Net*_8: *.8 J2.4 P1.7 | length 58.1
  Top Layer w0.3: P1.7 82.379,79.389 82.379,80.279 87.1,85 87.1,89.9 93.01,95.81 93.45,95.81 *.8 ; v2(110.2,64.2) 110.257,64.257 110.257,64.7 110.75,65.193 J2.4
  Bottom Layer w0.3: P1.7 93.715,79.285 108.8,64.2 v2(110.2,64.2)
Net*_9: *.9 P1.8 | length 23.2
  Top Layer w0.3: P1.8 82.387,76.857 82.387,77.945 87.8,83.358 87.8,89.43 92.667,94.297 92.907,94.297 93.45,94.84 *.9
Net*_10: *.10 P1.9 R1.1 | length 24.7
  Top Layer w0.3: P1.9 88.5,80.43 88.5,89.275 91.775,92.55 R1.1 91.825,92.55 92.545,93.27 93.45,93.27 *.10
Net*_11: *.11 P1.10 | length 26.1
  Top Layer w0.3: P1.10 82.379,71.769 83.269,71.769 89.2,77.7 89.2,88.072 92.916,91.788 92.938,91.788 93.45,92.3 *.11
Net*_12: *.12 P1.11 | length 26.8
  Top Layer w0.3: P1.11 90,76.85 90,87.602 92.916,90.518 92.938,90.518 93.45,91.03 *.12
Net*_13: *.13 J1.A7 J1.B7 P2.14 | length 81.6
  Top Layer w0.3: *.13 93.45,89.76 92.907,89.217 92.885,89.217 91.1,87.432 91.1,76.2 88,73.1 88,66.1 97.1,57 ; v2(98.1,57) 97.1,57 ; J1.A7 102.75,45.738 102.515,45.503 101.985,45.503 101.75,45.738 J1.B7 101.75,47.654 101.802,47.706 101.802,52.298 97.1,57
  Bottom Layer w0.3: v2(98.1,57) 118.22,57 P2.14
Net*_14: *.14 J1.A6 J1.B6 P2.13 | length 78.8
  Top Layer w0.3: *.14 92.1,86.84 92.1,75.6 89.173,72.673 89.173,66.827 97.5,58.5 ; v2(98.6,58.5) 97.5,58.5 ; J1.A6 102.25,46.962 102.485,47.197 102.75,47.197 ; J1.B6 103.25,46.962 103.015,47.197 102.75,47.197 ; 97.5,58.5 102.75,53.25 102.75,47.197
  Bottom Layer w0.3: v2(98.6,58.5) 117.18,58.5 P2.13
Net*_15: *.15 C5.1 P2.11 SW2.1 SW2.2 | length 57.4
  Top Layer w0.3: SW2.1 SW2.2 114.575,60.975 P2.11 122.651,69.199 122.651,70.149 114.3,78.5 114.3,87.762 113.712,88.35 C5.1@113.52,88.35 ; *.15 111.275,88.49 C5.1
Net*_16: *.16 J2.9 P2.10 | length 49.1
  Top Layer w0.3: J2.9 108.25,87.107 110.416,89.273 110.438,89.273 110.95,89.785 *.16 111.55,89.485 113.357,89.485 115.3,87.542 115.3,80.178 122.613,72.865 122.613,71.777 P2.10
Net*_17: *.17 J2.10 P2.9 | length 48.9
  Top Layer w0.3: J2.10 107.75,87.877 110.416,90.543 110.438,90.543 110.95,91.055 *.17 111.55,90.755 112.691,90.755 116.4,87.046 116.4,81.618 122.613,75.405 122.613,74.317 P2.9
Net*_18: *.18 J2.11 P2.8 | length 48.9
  Top Layer w0.3: J2.11 107.25,88.647 110.416,91.813 110.438,91.813 110.95,92.325 *.18 111.55,92.025 112.275,92.025 117.1,87.2 117.1,83.458 122.613,77.945 122.613,76.857 P2.8
Net*_19: *.19 J2.13 P2.7 | length 49.1
  Top Layer w0.3: J2.13 106.25,88.917 110.416,93.083 110.438,93.083 110.95,93.595 *.19 111.55,93.295 111.872,93.295 118.1,87.067 118.1,85 121.698,81.402 121.698,81.4 122.3,80.798 122.302,80.798 122.613,80.487 122.613,79.397 P2.7
Net*_20: *.20 J2.15 P2.6 | length 49.6
  Top Layer w0.3: J2.15 105.25,89.187 110.628,94.565 110.95,94.565 *.20 111.55,94.565 112.035,94.565 119.2,87.4 119.2,86.1 122.551,82.749 122.551,81.999 P2.6
Net*_21: *.21 P2.5 R5.2 | length 33.6
  Top Layer w0.3: R5.2 102.575,87.782 110.416,95.623 110.438,95.623 110.95,96.135 *.21 111.511,95.874 112.226,95.874 122.711,85.389 122.711,84.379 P2.5
Net*_23: *.23 P2.4 | length 16.9
  Top Layer w0.3: *.23 111.531,98.394 112.259,98.394 122.611,88.042 122.611,87.019 P2.4
Net*_24: *.24 P2.3 | length 16.4
  Top Layer w0.3: *.24 113.155,99.945 122.495,90.605 122.495,89.675 P2.3
Net*_25: *.25 P2.2 | length 15.6
  Top Layer w0.3: *.25 113.985,101.215 122.495,92.705 122.495,92.215 P2.2
Net*_26: *.26 P1.13 | length 76.6
  Top Layer w0.381: v2@110.065,102.5 v2(110.073,102.493) 111.242,102.493 *.26
  Bottom Layer w0.3: P1.13 82.506,64.045 85.251,61.3 112.6,61.3 114.6,63.3 114.6,66.8 111,70.4 111,101.566 v2@110.065,102.5
Net*_27: *.27 P1.12 | length 76.2
  Top Layer w0.381: v2(109.9,103.7) 109.913,103.713 111.208,103.713 *.27
  Bottom Layer w0.3: P1.12 86.16,62.7 112,62.7 113.4,64.1 113.4,66.1 109.4,70.1 109.4,103.309 109.641,103.55 109.669,103.55 109.819,103.7 v2(109.9,103.7)
NetC6_1: C6.1 J2.33 Q1.3 | length 18.1
  Top Layer w0.3: C6.1 96.25,64.26 J2.33 96.25,67.35 102.5,73.6 Q1.3
NetJ1_A5: J1.A5 R3.2 | length 1.9
  Top Layer w0.3: R3.2 101.25,48.175 J1.A5
NetJ1_B5: J1.B5 R4.2 | length 1.9
  Top Layer w0.3: J1.B5 104.25,48.175 R4.2
NetQ1_1: Q1.1 R5.1 | length 1.2
  Top Layer w0.3: R5.1 103.437,83.288 103.437,82.113 Q1.1
pads on no net: *.22 J1. J1.A8 J1.B8 J2.8 J2.12 J2.14 P1.16 P2.16 ST1.1 ST2.1 ST3.1 ST4.1 U1.4

## Polygon pours and split planes (outlines as drawn)
GND on Bottom Layer "GND_L02_P001" (solid, pour order 1): 80.8,112.7 80.8,39.3 124.2,39.3 124.2,112.7
GND on Top Layer "GND_L01_P000" (solid, pour order 0): 80.8,112.7 80.8,39.3 124.2,39.3 124.2,112.7

## Keep-outs
Keep-Out Layer:
  rectangle: 80.8,106.5 124.2,112.7

## Silkscreen, mask and mechanical layers (free items; w line width, h text height)
Top Overlay:
  text "RESET" at 90.751,45.6 h0.75
  text "BOOT" at 111.125,45.6 h0.75
Bottom Overlay:
  drawing of 19 lines, arcs and shapes, not listed
  text "ESP32-C6-DisplayBoard" at 110.123,111.375 h0.75
  text "2/23" at 103.875,110.025 h0.75
  text "3V3" at 85.899,94.15 h0.75
  text "GND" at 121.1,94.15 h0.75
  text "TXD0" at 121.1,91.61 h0.75
  text "EN" at 85.125,91.575 h0.75
  text "RXD0" at 121.1,89.07 h0.75
  text "GPIO4" at 87.249,89.035 h0.75
  text "GPIO15" at 121.1,86.53 h0.75
  text "GPIO5" at 87.249,86.495 h0.75
  text "GPIO23" at 121.1,83.99 h0.75
  text "GPIO6" at 87.249,83.955 h0.75
  text "GPIO22" at 121.1,81.45 h0.75
  text "GPIO7" at 87.249,81.415 h0.75
  text "GPIO21" at 121.1,78.91 h0.75
  text "GPIO0" at 87.249,78.875 h0.75
  text "GPIO20" at 121.1,76.37 h0.75
  text "GPIO1" at 86.999,76.335 h0.75
  text "GPIO19" at 121.1,73.83 h0.75
  text "GPIO8" at 87.249,73.795 h0.75
  text "GPIO18" at 121.1,71.29 h0.75
  text "GPIO10" at 87.874,71.255 h0.75
  text "GPIO9" at 121.1,68.75 h0.75
  text "GPIO11" at 87.624,68.715 h0.75
  text "GND" at 121.1,66.21 h0.75
  text "GPIO2" at 87.249,66.175 h0.75
  text "GPIO13" at 121.1,63.67 h0.75
  text "GPIO3" at 87.249,63.635 h0.75
  text "GPIO12" at 121.1,61.13 h0.75
  text "5V" at 85.125,61.095 h0.75
  text "GND" at 121.1,58.59 h0.75
  text "GND" at 85.874,58.555 h0.75
Mechanical 1:
  lines w0.254: 81,50.3 102.5,50.3 102.5,43.9 ; 122.73,112.5 cw(c122.73,111.23) 124,111.23 ; 122.73,112.5 cw(c122.73,111.23) 124,111.23 ; 122.73,112.5 82.27,112.5 ccw(c82.27,111.23) 81,111.23 81,40.77 ccw(c82.27,40.77) 82.27,39.5 122.73,39.5 ccw(c122.73,40.77) 124,40.77 124,111.23

## Dimensions
102,68.5 to 122.73,39.5 on Mechanical 1
102.5,68 to 81,111.23 on Mechanical 1
101.75,66.025 to 82.27,39.5 on Mechanical 1
122.725,94.525 to 124,111.23 on Mechanical 1
82.275,94.525 to 81,111.23 on Mechanical 1
122.73,39.5 to 122.725,56.425 on Mechanical 1
82.27,39.5 to 82.275,56.425 on Mechanical 1
81,111.23 to 102.5,110.8 on Mechanical 1
122.73,112.5 to 122.73,39.5 on Mechanical 1
81,111.23 to 124,111.23 on Mechanical 1

## Text inside footprints (layer, text, board x,y; h text height)
J1: Mechanical 13 "PCB EDGE" at 107.7,39.7 h0.61